# Altium PCB FMCW_Module_Radar1.PcbDoc
Units mil, origin at the board's own origin, x right, y up, seen from the top; angles counter-clockwise.
Board outline 6000 x 4000 mil, 2 copper layers (Top Layer, Bottom Layer); 51 components, 32 nets, 217 pads, 6 vias.
Unrouted connection lines stored in the file: 5.
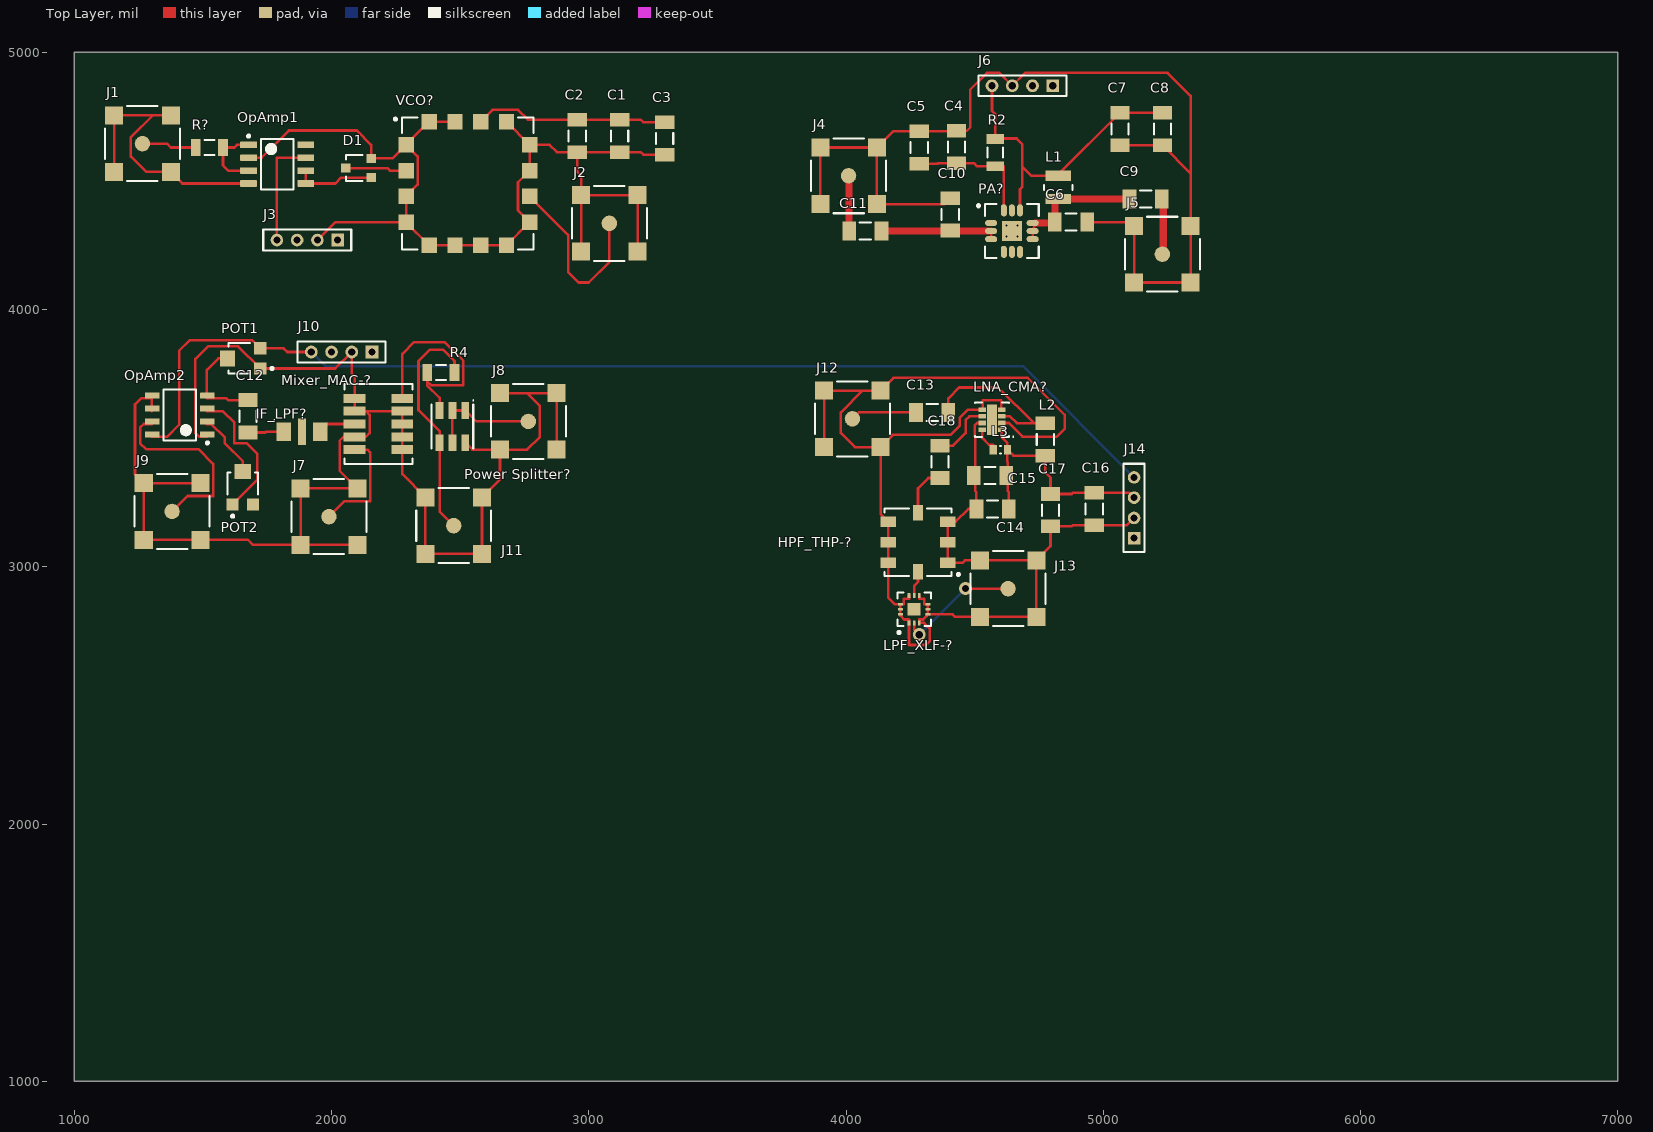
[diagram p0: Top Layer view]
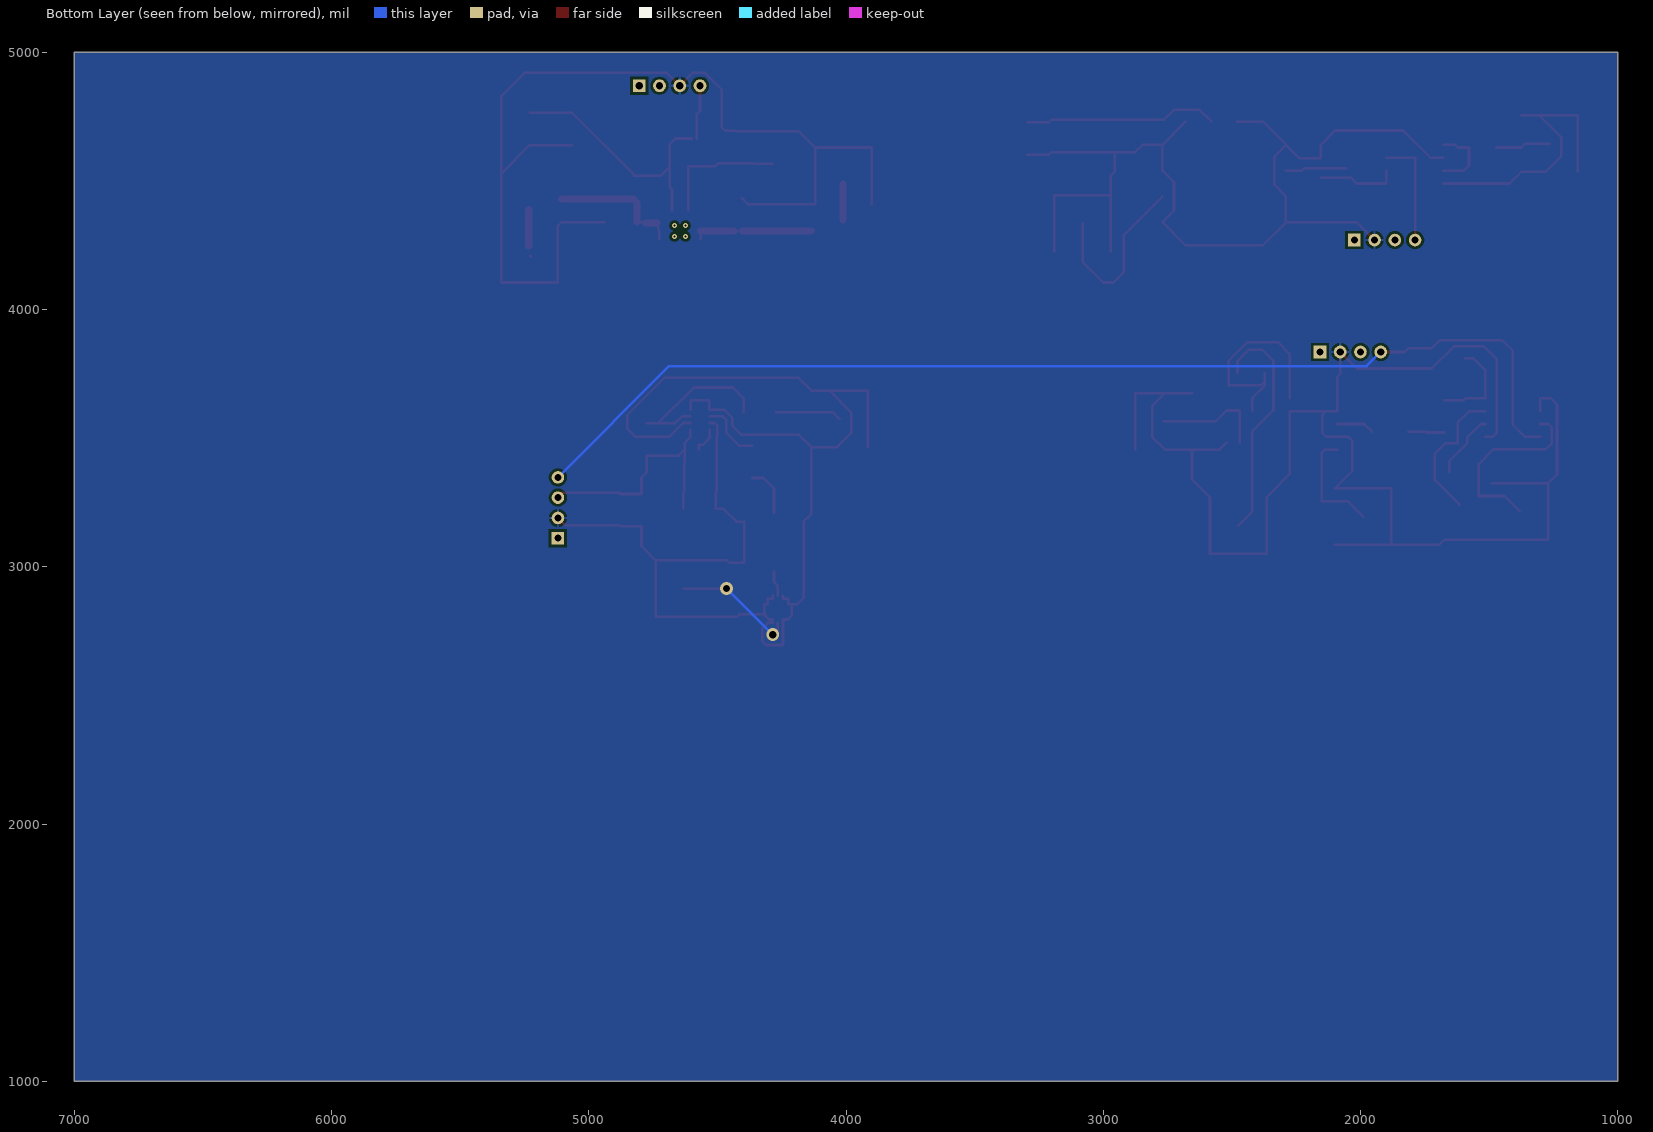
[diagram p1: Bottom Layer view, seen from below]

## Layer stack, top to bottom
Top Solder: solder mask 0.4, Solder Resist, Dk 3.5
Top Layer: signal copper 1.4
Dielectric 1: dielectric 12.6, FR-4, Dk 4.8
Bottom Layer: signal copper 1.4
Bottom Solder: solder mask 0.4, Solder Resist, Dk 3.5

## Board outline
1000,1000 7000,1000 7000,5000 1000,5000

## Design rules (kind name [scope] priority, off if disabled: settings)
Clearance [All] p1: gap=10
PolygonConnect [All] p1: connectstyle=Relief reliefconductorwidth=10 reliefentries=4 polygonreliefangle="90 Angle" airgapwidth=10
RoomDefinition FMCW_Module_Schematic [InComponentClass('FMCW_Module_Schematic')] p1: confinementstyle=ConfineIn formatcopy=TRUE lockcomponents=FALSE outline 7130,1820 9855,1820 9855,2480 7130,2480
RoutingVias [All] p1: holewidth=28 width=50 viastyle="Through Hole" minholewidth=28 minwidth=50 maxholewidth=28 maxwidth=50
SolderMaskExpansion [All] p1: expansion=4
Width [All] p1: maxlimit=10 minlimit=10 preferedwidth=10
30 further rules are at their usual default settings.

## Components (designator, comment, footprint, x,y, rotation, side; value= is the part's Value field where it differs from the comment)
C1 "CAP 0.5pF 25V 1206(3216)" CAPC1206(3216)100_M 3120,4675 r270 top
C2 "CAP 0.5pF 25V 1206(3216)" CAPC1206(3216)100_M 2955,4675 r270 top
C3 "CAP 0.5pF 25V 1206(3216)" CAPC1206(3216)100_M 3295,4665 r270 top
C4 "CAP 0.5pF 25V 1206(3216)" CAPC1206(3216)100_M 4430,4632.01 r270 top
C5 "CAP 0.5pF 25V 1206(3216)" CAPC1206(3216)100_M 4285,4630 r270 top
C6 "CAP 0.5pF 25V 1206(3216)" CAPC1206(3216)100_M 4875,4340 r180 top
C7 "CAP 0.5pF 25V 1206(3216)" CAPC1206(3216)100_M 5065,4702.01 r90 top
C8 "CAP 0.5pF 25 1206(3216)" CAPC1206(3216)100_M 5230,4702.01 r90 top
C9 "CAP 0.5pF 25V 1206(3216)" CAPC1206(3216)100_M 5165,4430 r180 top
C10 "CAP 0.5pF 25V 1206(3216)" CAPC1206(3216)100_M 4405,4370 r270 top
C11 "CAP 0.5pF 25V 1206(3216)" CAPC1206(3216)100_M 4075,4305 r0 top
C12 "CAP 0.5pF 25V 1206(3216)" CAPC1206(3216)100_M 1675,3585 r90 top
C13 "CAP 0.5pF 25V 1206(3216)" CAPC1206(3216)100_M 4335,3600 r180 top
C14 "CAP 0.5pF 25V 1206(3216)" CAPC1206(3216)100_M 4570,3225 r180 top
C15 "CAP 0.5pF 25V 1206(3216)" CAPC1206(3216)100_M 4560,3355 r180 top
C16 "CAP 0.5pF 25V 1206(3216)" CAPC1206(3216)100_M 4965,3225 r90 top
C17 "CAP 0.5pF 25V 1206(3216)" CAPC1206(3216)100_M 4795,3220 r90 top
C18 "CAP 0.5pF 25V 1206(3216)" CAPC1206(3216)100_M 4365,3407.99 r90 top
D1 "BAT54-7-F" DIOD-SOT23-3_V 2105,4550 r90 top
HPF_THP-? "HPF_THP-1225" QFN203P635X635X254-8N 4280,3095.16 r180 top
IF_LPF? "Don't forget to gnd? the thermal pad_ELK-E103FA" SON0P330X220_HS-3N 1885,3525 r0 top
J1 "CONSMA001-SMD" CON-SMA-SMD 1265,4645 r0 top
J2 "CONSMA001-SMD" CON-SMA-SMD 3080,4335 r0 top
J3 "MMS-104-01-L-SV" SMTC-MMS-104-01-X-SV 2023.74,4270 r180 top
J4 "CONSMA001-SMD" CON-SMA-SMD 4010,4520 r0 top
J5 "CONSMA001-SMD" CON-SMA-SMD 5230,4215 r0 top
J6 "MMS-104-01-L-SV" SMTC-MMS-104-01-X-SV 4803.74,4870 r180 top
J7 "CONSMA001-SMD" CON-SMA-SMD 1990,3195 r0 top
J8 "CONSMA001-SMD" CON-SMA-SMD 2765,3565 r0 top
J9 "CONSMA001-SMD" CON-SMA-SMD 1380,3215 r0 top
J10 "MMS-104-01-L-SV" SMTC-MMS-104-01-X-SV 2157.48,3835 r180 top
J11 "CONSMA001-SMD" CON-SMA-SMD 2475,3160 r0 top
J12 "CONSMA001-SMD" CON-SMA-SMD 4025,3575 r0 top
J13 "CONSMA001-SMD" CON-SMA-SMD 4630,2915 r0 top
J14 "MMS-104-01-L-SV" SMTC-MMS-104-01-X-SV 5120,3111.26 r90 top
L1 "1008CS-102XFLC" COIL-1008CS_V 4825,4474.92 r180 top
L2 "CAP 0.5pF 25V 1206(3216)" CAPC1206(3216)100_M 4775,3495 r90 top
L3 "CAP 2.2uF 4V 0603(1608)" CAPC0603(1608)100_L 4600,3455 r0 top
LNA_CMA? "LNA_CMA545G1" SON66P300X114_HS-9N 4567.6,3572.01 r180 top
LPF_XLF-? "LPF_XLF-192" QFN51P300X300X89_HS-13N 4265,2835 r90 top
Mixer_MAC-? "Mixer_MAC-42" SON127P640X152-10N 2182.48,3555 r0 top
OpAmp1 "INA106U" D0008A_M 1788.78,4565 r0 top
OpAmp2 "INA826AID" D0008A_N 1410,3590 r180 top
PA? "PA_MMG" PQFN80P530X530X220_HS-13N 4645,4305 r0 top
POT1 "35WR10KLFTR" BI-35WR10KLFTR-3_V 1660,3810 r180 top
POT2 "35WR10KLFTR" BI-35WR10KLFTR-3_V 1655,3305 r90 top
"Power Splitter?" "TCP-2-25+_PowerSplitter" SON127P410X406-6N 2470,3545 r270 top
R2 "1R 5% 1206(3216)" RESC1206(3216)_L 4580,4610 r90 top
R4 "1R 5% 1206(3216)" RESC1206(3216)_L 2425,3755 r0 top
R? "1R 5% 1206(3216)" RESC1206(3216)_L 1525,4630 r0 top
VCO? "VCO_ROS2150" VCO_ROS2150 2530,4490 r0 top

## Footprints (in the part's own frame and the unit in brackets; to place one, negate y for a bottom-side part, rotate by r counter-clockwise, add the part's x,y. Pads: shape width x height; smd on the part's side, far side on the other; paste and mask are expansions set on the pad)
BI-35WR10KLFTR-3_V [mm] "SMD, 3-Leads, Body 3x3.1mm"
  rect 1.2x1.2 smd: 1(-1.6,1) 3(-1.6,-1)
  rect 1.5x1.6 smd: 2(1.65,0)
  silkscreen extent -2.88,-1.5 1.55,1.5, body extent -1.55,-1.5 1.55,1.5, height 1.8
CAPC0603(1608)100_L [mm] "Chip Capacitor, Body 1.6x0.8mm, Height 1.0mm, IPC High Density"
  rect 0.7x0.9 smd: 1(-0.7,0) 2(0.7,0)
  silkscreen extent -0.05,-0.35 0.05,0.35, body extent -0.87,-0.47 0.88,0.48, height 1
CAPC1206(3216)100_M [mm] "Chip Capacitor, Body 3.2x1.6mm, Height 1mm, IPC Low Density"
  rect 1.35x1.9 smd: 1(-1.6,0) 2(1.6,0)
  silkscreen extent -0.55,-0.85 0.55,0.85, body extent -1.7,-0.9 1.7,0.9, height 1
COIL-1008CS_V [mm] "SMD, 2-Leads, Body 2.92x2.79mm"
  rect 2.54x1.02 smd: 1(0,1.145) 2(0,-1.145)
  silkscreen extent -1.4,-0.24 1.4,0.24, body extent -1.39,-1.46 1.4,1.46, height 2.03
CON-SMA-SMD [mil] "Connector, SMA Female, 5-Lead, SM, Straight, Body 7x7mm"
  round 60 smd: 1(0,0)
  rect 70x70 smd: 2(-110,110) 3(110,110) 4(110,-110) 5(-110,-110)
  silkscreen extent -146,-146 146,146
D0008A_M [mm] "SOIC, 8-Leads, Body 5x4mm, Pitch 1.27mm, IPC Low Density"
  rrect15% 1.65x0.65 smd: 1(-2.825,1.905) 2(-2.825,0.635) 3(-2.825,-0.635) 4(-2.825,-1.905) 5(2.825,-1.905) 6(2.825,-0.635) 7(2.825,0.635) 8(2.825,1.905)
  silkscreen extent -2.95,-2.5 1.6,2.9, body extent -3,-2.45 3,2.45, height 1.63
D0008A_N [mm] "SOIC, 8-Leads, Body 5x4mm, Pitch 1.27mm, IPC Medium Density"
  rrect17% 1.45x0.6 smd: 1(-2.725,1.905) 2(-2.725,0.635) 3(-2.725,-0.635) 4(-2.725,-1.905) 5(2.725,-1.905) 6(2.725,-0.635) 7(2.725,0.635) 8(2.725,1.905)
  silkscreen extent -2.85,-2.5 1.6,2.88, body extent -3,-2.45 3,2.45, height 1.63
DIOD-SOT23-3_V [mm] "SOT23, 3-Leads, Body 3x1.4mm, Pitch 0.95mm"
  rect 0.9x0.95 smd: 1(-0.95,-1.25) 2(0.95,-1.25) 3(0,1.25)
  silkscreen extent -1.3,-0.38 1.3,1.25, body extent -1.14,-1.18 1.17,1.44, height 1.1
PQFN80P530X530X220_HS-13N [mm] "PQFN, 12-Leads, Body 5.30x5.30mm, Pitch 0.80mm, Thermal Pad 2.00x2.00mm, IPC Medium Density"
  oval 1.2x0.6 smd: 2(-2.05,0.8) 3(-2.05,0) 4(-2.05,-0.8) 10(2.05,-0.8) 11(2.05,0) 12(2.05,0.8)
  oval 0.6x1.2 smd: 6(-0.8,-2.05) 7(0,-2.05) 8(0.8,-2.05) 14(0.8,2.05) 15(0,2.05) 16(-0.8,2.05)
  rect 2x2 smd: 13(0,0)
  silkscreen extent -3.42,-2.65 2.65,2.65, body extent -2.65,-2.65 2.65,2.65, height 2.2
QFN51P300X300X89_HS-13N [mm] "QFN, 12-Leads, Body 3.00x3.00mm, Pitch 0.51mm, Thermal Pad 1.27x1.27mm, IPC Medium Density"
  rect 0.51x0.25 smd: 1(-1.355,0.51) 2(-1.355,0) 3(-1.355,-0.51) 7(1.355,-0.51) 8(1.355,0) 9(1.355,0.51)
  rect 0.25x0.51 smd: 4(-0.51,-1.355) 5(0,-1.355) 6(0.51,-1.355) 10(0.51,1.355) 11(0,1.355) 12(-0.51,1.355)
  rect 1.27x1.27 smd: 13(0,0)
  silkscreen extent -2.42,-1.65 1.65,1.65, body extent -1.5,-1.5 1.5,1.5, height 0.89
QFN203P635X635X254-8N [mm] "QFN, 8-Leads, Body 6.35x6.35mm, Pitch 3.18mm/2.03mm, IPC Medium Density"
  rect 1.52x1.02 smd: 1(-2.925,2.03) 2(-2.925,0) 3(-2.925,-2.03) 5(2.925,-2.03) 6(2.925,0) 7(2.925,2.03)
  rect 1.02x1.52 smd: 4(0,-2.925) 8(0,2.925)
  silkscreen extent -4.1,-3.33 3.33,3.32, body extent -3.18,-3.18 3.18,3.18, height 2.54
RESC1206(3216)_L [mm] "Chip Resistor, Body 3.2x1.6mm, IPC High Density"
  rect 0.95x1.7 smd: 1(-1.35,0) 2(1.35,0)
  silkscreen extent -0.5,-0.75 0.5,0.75, body extent -1.67,-0.87 1.67,0.87, height 0.75
SMTC-MMS-104-01-X-SV [mm] "Through Hole Box Connector Strip Assembly, 1x4 Pins, Vertical, 2mm Pitch, Female"
  rect 1.25x1.25 hole 0.711: 1(0,0)
  round 1.25 hole 0.711: 2(2,0) 3(4,0) 4(6,0)
  silkscreen extent -1.34,-1.02 7.35,1.02, body extent -1.28,-1 7.28,1, height 4.44
SON0P330X220_HS-3N [mm] "SON, 2-Leads, Body 1.80x3.30mm, Pitch 0.00mm, Thermal Pad 2.60x0.80mm, IPC Medium Density"
  rect 1.4x1.8 smd: 1(-1.8,0) 2(1.8,0)
  rect 0.8x2.6 smd: 3(0,0)
  silkscreen extent -2.76,1.06 -2.66,1.16, body extent -1.65,-0.9 1.65,0.9, height 2.2
SON66P300X114_HS-9N [mm] "SON, 8-Leads, Body 3.00x3.00mm, Pitch 0.66mm, Thermal Pad 3.00x1.00mm, IPC Medium Density"
  rect 0.76x0.46 smd: 1(-0.955,0.99) 2(-0.955,0.33) 3(-0.955,-0.33) 4(-0.955,-0.99) 5(0.955,-0.99) 6(0.955,-0.33) 7(0.955,0.33) 8(0.955,0.99)
  rect 1x3 smd: 9(0,0)
  silkscreen extent -2.15,-1.7 1.7,1.75, body extent -1.55,-1.55 1.55,1.55, height 1.14
SON127P410X406-6N [mm] "SON, 6-Leads, Body 3.81x4.06mm, Pitch 1.27mm, IPC Medium Density"
  rect 1.65x0.76 smd: 1(-1.59,1.27) 2(-1.59,0) 3(-1.59,-1.27) 4(1.59,-1.27) 5(1.59,0) 6(1.59,1.27)
  silkscreen extent -2.63,-2.06 2.18,2.1, body extent -2.03,-1.91 2.03,1.91, height 4.06
SON127P640X152-10N [mm] "SON, 10-Leads, Body 7.62x6.35mm, Pitch 1.27mm, IPC Medium Density"
  rect 2.16x0.89 smd: 1(-2.35,2.54) 2(-2.35,1.27) 3(-2.35,0) 4(-2.35,-1.27) 5(-2.35,-2.54) 6(2.35,-2.54) 7(2.35,-1.27) 8(2.35,0) 9(2.35,1.27) 10(2.35,2.54)
  silkscreen extent -3.82,-3.96 3.37,4.01, body extent -3.22,-3.81 3.22,3.81, height 1.52
VCO_ROS2150 [mm]
  rect 1.52x1.52 smd: 1(-6.1,3.81) 2(-6.1,1.27) 3(-6.1,-1.27) 4(-6.1,-3.81) 5(-3.81,-6.1) 6(-1.27,-6.1) 7(1.27,-6.1) 8(3.81,-6.1) 9(6.1,-3.81) 10(6.1,-1.27) 11(6.1,1.27) 12(6.1,3.81) 13(3.81,6.1) 14(1.27,6.1) 15(-1.27,6.1) 16(-3.81,6.1)
  silkscreen extent -7.27,-6.5 6.5,6.5, body extent -6.35,-6.35 6.35,6.35, height 4.57

## Part data
C1 C2 C3 C4 C5 C6 C7 C8 C9 C10 C11 C12 C13 C14 C15 C16 C17 C18 L2: library part CMP-1037-00004-1, "CAP 0.5pF 25V ±0.1pF 1206 (3216 Metric) Thickness 1mm SMD"
D1: library part CMP-0303-00002-1, "Schottky Diode, 30V ,200mW, SOT23-3"
IF_LPF?: library part IF_LPF_ELK-E103FA
J1 J2 J4 J5 J7 J8 J9 J11 J12 J13: library part CMP-0168-00011-1, "SMA Female Surface Mount Connector, Gold Finish"
J3 J6 J10 J14: library part CMP-1022-00067-1, "Tiger Claw(TM) Socket Strip, Through-hole, Vertical, -55 to 125 degC, 2 mm Pitch, 4-Pin, Female, RoHS"
L1: library part CMP-1716-00001-2, "Chip Inductor, 1000 nH, +/- 1%, -40 to 125 degC, 2-Pin SMD, RoHS, Tape and Reel"
L3: library part CMP-1035-02752-1, "CAP 2.2uF 4V ±10% 0603 (1608 Metric) Thickness 1mm SMD"
OpAmp1: library part CMP-0985-00082-2, "Precision Fixed-Gain Differential Amplifier, -40 to 85 degC, 8-pin SOIC (D8), Green (RoHS & no Sb/Br)"
OpAmp2: library part CMP-0944-00043-2, "Precision, 200-uA Supply Current, 36-V Supply Instrumentation Amplifier, -40 to 125 degC, 8-pin SOIC (D8), Green (RoHS & no Sb/Br)"
POT1 POT2: library part CMP-1745-00001-1, "3 mm Single-Turn Open Frame Surface Mount Cermet Trimming Potentiometer, +/- 25%, 35 W, -40 to 125 degC, 3-Pin SMD, RoHS, Tape and Reel"
R2 R4 R?: library part CMP-1014-00002-1, "1R 0.25W 5% 1206 (3216 Metric)  SMD"

## Via types
v1: diameter 19.68, hole 7.87, Top Layer to Bottom Layer, 4 vias
v2: diameter 50, hole 28, Top Layer to Bottom Layer, 2 vias

## Nets (pads, with @x,y where several pads share a name; then routed paths per layer and width w, separated by ;. In a path a pad name is that pad's centre, name@x,y a point inside that pad or via, vN(x,y) a via of type N, cw(c..) or ccw(c..) an arc to the next point about the centre after c; other vN are vias at no path point)
GND: "Power Splitter?.6" C1.2 C2.2 C3.2 C4.1 C5.1 C6.1 C7.1 C8.1 C10.1 C14.2 C15.2 C16.1 C17.1 D1.2 HPF_THP-?.1 HPF_THP-?.2 HPF_THP-?.3 HPF_THP-?.5 HPF_THP-?.6 HPF_THP-?.7 J1.2 J1.3 J1.4 J1.5 J2.2 J2.3 J2.4 J2.5 J3.2 J4.2 J4.3 J4.4 J4.5 J5.2 J5.3 J5.4 J5.5 J6.3 J7.2 J7.3 J7.4 J7.5 J8.2 J8.3 J8.4 J8.5 J9.2 J9.3 J9.4 J9.5 J10.2 J11.2 J11.3 J11.4 J11.5 J12.2 J12.3 J12.4 J12.5 J13.2 J13.3 J13.4 J13.5 J14.2 LNA_CMA?.2 LNA_CMA?.4 LNA_CMA?.5 LNA_CMA?.7 LPF_XLF-?.1 LPF_XLF-?.3 LPF_XLF-?.4 LPF_XLF-?.5 LPF_XLF-?.6 LPF_XLF-?.7 LPF_XLF-?.9 LPF_XLF-?.10 LPF_XLF-?.11 LPF_XLF-?.12 Mixer_MAC-?.1 Mixer_MAC-?.2 Mixer_MAC-?.4 Mixer_MAC-?.6 Mixer_MAC-?.7 Mixer_MAC-?.8 Mixer_MAC-?.9 OpAmp1.2 OpAmp1.4 OpAmp2.1 OpAmp2.5 OpAmp2.6 POT1.1 VCO?.1 VCO?.3 VCO?.4 VCO?.5 VCO?.6 VCO?.7 VCO?.8 VCO?.9 VCO?.11 VCO?.12 VCO?.13 VCO?.15 VCO?.16 | length 21566.1
  Top Layer w10: J1.5 J1.2 1305,4755 ; OpAmp2.6@1300.43,3605 1300.43,3655 1260,3655 1236,3631 1236,3359 J9.2 ; J1.3 1305,4755 ; J9.3 J9.2 ; OpAmp2.1@1515,3505 1486,3505 1471,3520 1471,3808 1520,3857 1636.62,3857 POT1.1 2014.37,3770.63 J10.2 2078.74,3750.22 2089.96,3739 Mixer_MAC-?.1 Mixer_MAC-?.2 2133,3605 ; OpAmp1.4 1420,4490 J1.4 1280,4535 1220,4595 1220,4670 1305,4755 ; OpAmp1.2 1728,4590 1834,4696 2098.21,4696 2154.21,4640 D1.2 2237.24,4587.4 VCO?.1 ; J3.2 2015,4340 VCO?.4 ; J7.4 J7.5 ; VCO?.15 VCO?.16 2379.16,4730.16 2289.84,4640.84 VCO?.1 ; 2520,3482.4 2547.4,3455 J8.5 ; J8.2 2760,3675 ; VCO?.13 VCO?.12 ; J8.4 J8.3 2760,3675 ; J2.5 J2.2 ; J2.4 J2.3 J2.2 ; C3.2 3212,4602.01 3202,4612.01 C1.2 C2.2 ; J4.5 J4.2 J4.3 ; J12.5 J12.2 4065,3685 ; LPF_XLF-?.9 4244.92,2875 4225,2875 4225,2855.08 LPF_XLF-?.10 ; LPF_XLF-?.7 4285.08,2875 4305,2875 4305,2855.08 LPF_XLF-?.6 LPF_XLF-?.5 LPF_XLF-?.4 ; C10.1 4382.01,4410 J4.4 J4.3 ; LNA_CMA?.7 4510,3559.02 4500,3549.02 4500,3508 4502.01,3505.99 4502.01,3295 4507.01,3290 C14.2 4475.92,3225 4426,3175.08 HPF_THP-?.3 HPF_THP-?.2 HPF_THP-?.1 4452,3015.24 4461.76,3025 J13.2 J13.3 ; LNA_CMA?.2 4633,3559.02 4686.02,3506 4820,3506 4850,3536 4850,3591 4706.5,3734.5 4184.5,3734.5 J12.3 4065,3685 ; LNA_CMA?.4 4603,3610.98 4603,3647 4532,3647 4532,3610.98 LNA_CMA?.5 4473.98,3610.98 4443,3580 4443,3550 4405.56,3512.56 4182.56,3512.56 J12.4 ; C6.1 5105,4340 J5.2 J5.5 J5.4 J5.3 5340,4529.02 ; C7.1 C8.1 5340,4529.02 ; J14.2 5092.01,3162.01 C16.1 4882,3162.01 4877,3157.01 C17.1 4795,3080 J13.3 ; J9.2 J9.5 J9.4 1675,3105 1695,3085 J7.5 ; J7.5 J7.2 J7.3 2032,3373 2032,3490 2047,3505 Mixer_MAC-?.4 2133,3505 2148,3520 2148,3590 2133,3605 ; 2133,3605 Mixer_MAC-?.9 Mixer_MAC-?.8 Mixer_MAC-?.7 Mixer_MAC-?.6 2275,3360 J11.2 J11.5 J11.4 J11.3 2655,3340 J8.5 ; VCO?.4 VCO?.3 2335,4485.16 2335,4594.84 VCO?.1 ; VCO?.4 2289.84,4339.16 2379.16,4249.84 VCO?.5 VCO?.6 VCO?.7 VCO?.8 VCO?.9 2725,4385.16 2725,4494.84 VCO?.11 VCO?.12 ; J8.5 2760,3455 2810,3505 2810,3625 2760,3675 ; VCO?.12 2848,4640 2875.99,4612.01 C2.2 ; C2.2 2955,4536 2970,4521 J2.2 ; 4065,3685 3980,3600 3980,3520 4035,3465 J12.4 ; J4.3 4182.99,4692.99 C5.1 4427.99,4692.99 C4.1 4470,4695 4483,4708 4483,4854.74 4548.26,4920 4596.26,4920 J6.3 4696.26,4920 5250,4920 5340,4830 5340,4529.02 ; J12.4 4135,3204.92 HPF_THP-?.5 HPF_THP-?.6 HPF_THP-?.7 4164,3015.24 4164,2880 4188.92,2855.08 LPF_XLF-?.10 ; LPF_XLF-?.10 LPF_XLF-?.11 LPF_XLF-?.12 4211,2814.92 4211,2810 4226,2795 4244.92,2795 LPF_XLF-?.1 4244.92,2696.61 4245.54,2696 4311,2696 4325,2710 4325,2760 4303.45,2781.55 4285.08,2781.55 LPF_XLF-?.3 4285.08,2795 4300,2795 4313,2808 4313,2814.92 LPF_XLF-?.4 ; LPF_XLF-?.4 4414,2814.92 4423.92,2805 J13.5 J13.4 J13.3
NetC4_2: C4.2 C5.2 PA?.16 R2.1 | length 505.5
  Top Layer w10: C5.2 4356,4567.01 4358.01,4569.02 C4.2 4498,4569.02 4510.17,4556.85 R2.1 4613.5,4556.85 PA?.16
NetC6_2: C6.2 C9.2 L1.1 PA?.10 PA?.11 PA?.12 | length 497.3
  Top Layer w10: PA?.10 PA?.11 4734.79,4333.61 PA?.12@4735.71,4336.5 ; 4779.71,4336.5 4783.21,4340 C6.2
  Top Layer w28: PA?.12@4735.71,4336.5 4779.71,4336.5 ; C6.2 L1.1@4812.01,4415 ; L1.1 C9.2@5105,4429.84
NetC7_2: C7.2 C8.2 L1.2 PA?.14 | length 1019.7
  Top Layer w10: 4600,4665 4663.15,4665 4685,4643.15 4685,4556.85 ; PA?.14 4676.5,4467 4685,4475.5 4685,4556.85 ; C8.2 C7.2 4825,4525 L1.2 4721.85,4520 4685,4556.85
NetC9_1: C9.1 J5.1 | length 144.2
  Top Layer w10: J5.1@5225,4205 J5.1@5227.99,4207.99
  Top Layer w28: 5232.99,4247.99 5232.99,4387.99
NetC10_2: C10.2 C11.2 PA?.3 PA?.4 | length 433.3
  Top Layer w10: C10.2@4402.99,4305 C10.2 ; PA?.4 PA?.3
  Top Layer w28: C11.2@4133.99,4305 C11.2 C10.2@4402.99,4305 ; C10.2@4434.29,4305 PA?.3
NetC11_1: C11.1 J4.1 | length 140.1
  Top Layer w28: 4012.01,4347.92 4012.01,4487.99
NetC12_1: C12.1 IF_LPF?.1 | length 140.4
  Top Layer w10: C12.1 1743,3522.01 1745.99,3525 IF_LPF?.1
NetC12_2: C12.2 OpAmp2.4 POT1.2 | length 371.6
  Top Layer w10: POT1.2 1560,3810 1515,3765 1515,3655 1591,3655 1598.01,3647.99 C12.2
NetC13_1: C13.1 L2.2 LNA_CMA?.3 | length 643
  Top Layer w10: C13.1 4397.99,3654.98 4440,3696.99 4591,3696.99 4730,3557.99 ; LNA_CMA?.3 4636.99,3585 4664,3557.99 4730,3557.99 ; L2.2 4730,3557.99
NetC13_2: C13.2 J12.1 | length 257.4
  Top Layer w10: J12.1 4050,3600 C13.2
NetC18_1: C18.1 HPF_THP-?.4 | length 196.3
  Top Layer w10: HPF_THP-?.4 4280,3305 4320,3345 C18.1
NetC18_2: C18.2 LNA_CMA?.6 | length 241.5
  Top Layer w10: C18.2 4415.98,3470.98 4465,3520 4465,3570 4480,3585 LNA_CMA?.6
NetD1_1: D1.1 OpAmp1.5 OpAmp1.6 | length 313.6
  Top Layer w10: OpAmp1.6 OpAmp1.5 2015,4490 2037.6,4512.6 D1.1
NetD1_3: D1.3 VCO?.2 | length 238.2
  Top Layer w10: D1.3 2217,4550 2227,4540 VCO?.2
NetHPF_THP-?_8: HPF_THP-?.8 LPF_XLF-?.8 | length 97.9
  Top Layer w10: LPF_XLF-?.8 4265,2926 4280,2941 HPF_THP-?.8
NetIF_LPF?_2: IF_LPF?.2 Mixer_MAC-?.3 | length 146.5
  Top Layer w10: IF_LPF?.2 1985.87,3555 Mixer_MAC-?.3
NetJ1_1: J1.1 R?.1 | length 213.1
  Top Layer w10: J1.1 1360,4645 1375,4630 R?.1
NetJ2_1: J2.1 VCO?.10 | length 716.8
  Top Layer w10: VCO?.10 2920,4290.16 2920,4145 2960,4105 3000,4105 3080,4185 J2.1
NetJ7_1: J7.1 Mixer_MAC-?.5 | length 439
  Top Layer w10: J7.1 2050,3255 2150,3255 2150,3445 2140,3455 Mixer_MAC-?.5
NetJ8_1: "Power Splitter?.1" "Power Splitter?.2" "Power Splitter?.5" J8.1 | length 437.8
  Top Layer w10: 2470,3482.4 2470,3607.6 2520,3607.6 2562.6,3565 J8.1
NetJ9_1: J9.1 OpAmp2.7 | length 738.2
  Top Layer w10: OpAmp2.7@1300.43,3555 1270,3555 1256,3541 1256,3480 1279,3457 1483,3457 1540,3400 1540,3275 1440,3275 J9.1
NetJ11_1: "Power Splitter?.4" J11.1 R4.2 | length 918.3
  Top Layer w10: J11.1 2420,3215 2420,3482.4 2420,3527 2338,3609 2338,3800 2382,3844 2434.15,3844 2478.15,3800 R4.2
NetJ13_1: J13.1 LPF_XLF-?.2 | length 473.1
  Top Layer w10: LPF_XLF-?.2 4265,2756 v2(4285,2736) ; v2(4464,2915) J13.1
  Bottom Layer w10: v2(4285,2736) v2(4464,2915)
NetL3_1: L3.1 LNA_CMA?.8 | length 105.8
  Top Layer w10: LNA_CMA?.8 4530,3500 4555,3475 4572.44,3475 L3.1
NetMixer_MAC-?_10: "Power Splitter?.3" Mixer_MAC-?.10 R4.1 | length 866.8
  Top Layer w10: Mixer_MAC-?.10 2275,3828 2320,3873 2440,3873 2512,3801 2512,3706 2385.85,3706 2371.85,3720 ; R4.1 2371.85,3720 ; 2420,3607.6 2420,3657 2371.85,3705.15 2371.85,3720
NetOpAmp1_1: OpAmp1.1 OpAmp1.3 R?.2 | length 281.2
  Top Layer w10: OpAmp1.3 1598.15,4540 1578.15,4560 R?.2 1622,4630 1632,4640 OpAmp1.1
NetOpAmp2_2: OpAmp2.2 POT2.2 | length 253
  Top Layer w10: OpAmp2.2@1515,3555 1532,3555 1585.17,3501.83 1585.17,3480 1655,3410.17 POT2.2
NetOpAmp2_3: OpAmp2.3 POT2.1 | length 548.7
  Top Layer w10: OpAmp2.3@1515,3605 1577,3605 1622,3560 1622,3480 1671,3480 1711,3440 1711,3337.38 POT2.1
VCC: J3.4 J10.4 J14.4 OpAmp1.7 OpAmp2.8 POT1.3 | length 4795.8
  Top Layer w10: OpAmp2.8@1300.43,3505 1360,3505 1408,3553 1408,3840 1448,3880 1692.36,3880 POT1.3 1814,3849.37 1828.37,3835 J10.4 ; J3.4 1787.52,4589.52 1788,4590 OpAmp1.7
  Bottom Layer w10: J10.4 1976.26,3780 4687.48,3780 J14.4
VDD: C1.1 C2.1 C3.1 C14.1 C15.1 C16.2 C17.2 J3.3 J10.3 J14.3 L2.1 L3.2 LNA_CMA?.1 VCO?.14 | length 1722.7
  Top Layer w10: VCO?.14 2625.84,4776 2725,4776 2763.01,4737.99 C2.1 C1.1 3202,4737.99 3212,4727.99 C3.1 ; LNA_CMA?.1 4605.2,3504.36 4627.56,3482 L3.2 ; C14.1 4632.99,3290 4627.99,3295 4627.99,3360 4627.99,3407 4627.56,3407.43 L3.2 ; J14.3 5100.75,3287.99 C16.2 4882,3287.99 4877,3282.99 C17.2 4795,3347 4775,3367 L2.1 4650.55,3432.01 L3.2
VDD_PA: J6.4 R2.2 | length 212
  Top Layer w10: J6.4 4567.52,4772.48 4580,4760 R2.2
pads on no net: IF_LPF?.3 J3.1 J6.1 J6.2 J10.1 J14.1 LNA_CMA?.9 LPF_XLF-?.13 OpAmp1.8 PA?.2 PA?.6 PA?.7 PA?.8 PA?.13 PA?.15 POT2.3
copper on no net:
  other v1: 4623.35,4283.35 4666.65,4283.35 4623.35,4326.65 4666.65,4326.65

## Polygon pours and split planes (outlines as drawn)
GND on Bottom Layer "Top Layer-gnd" (solid, pour order 0): 1000,1000 7000,1000 7000,5000 1000,5000